# EAGLE board sx1509-breakout_mount_remap4 (EAGLE 9.1.3)
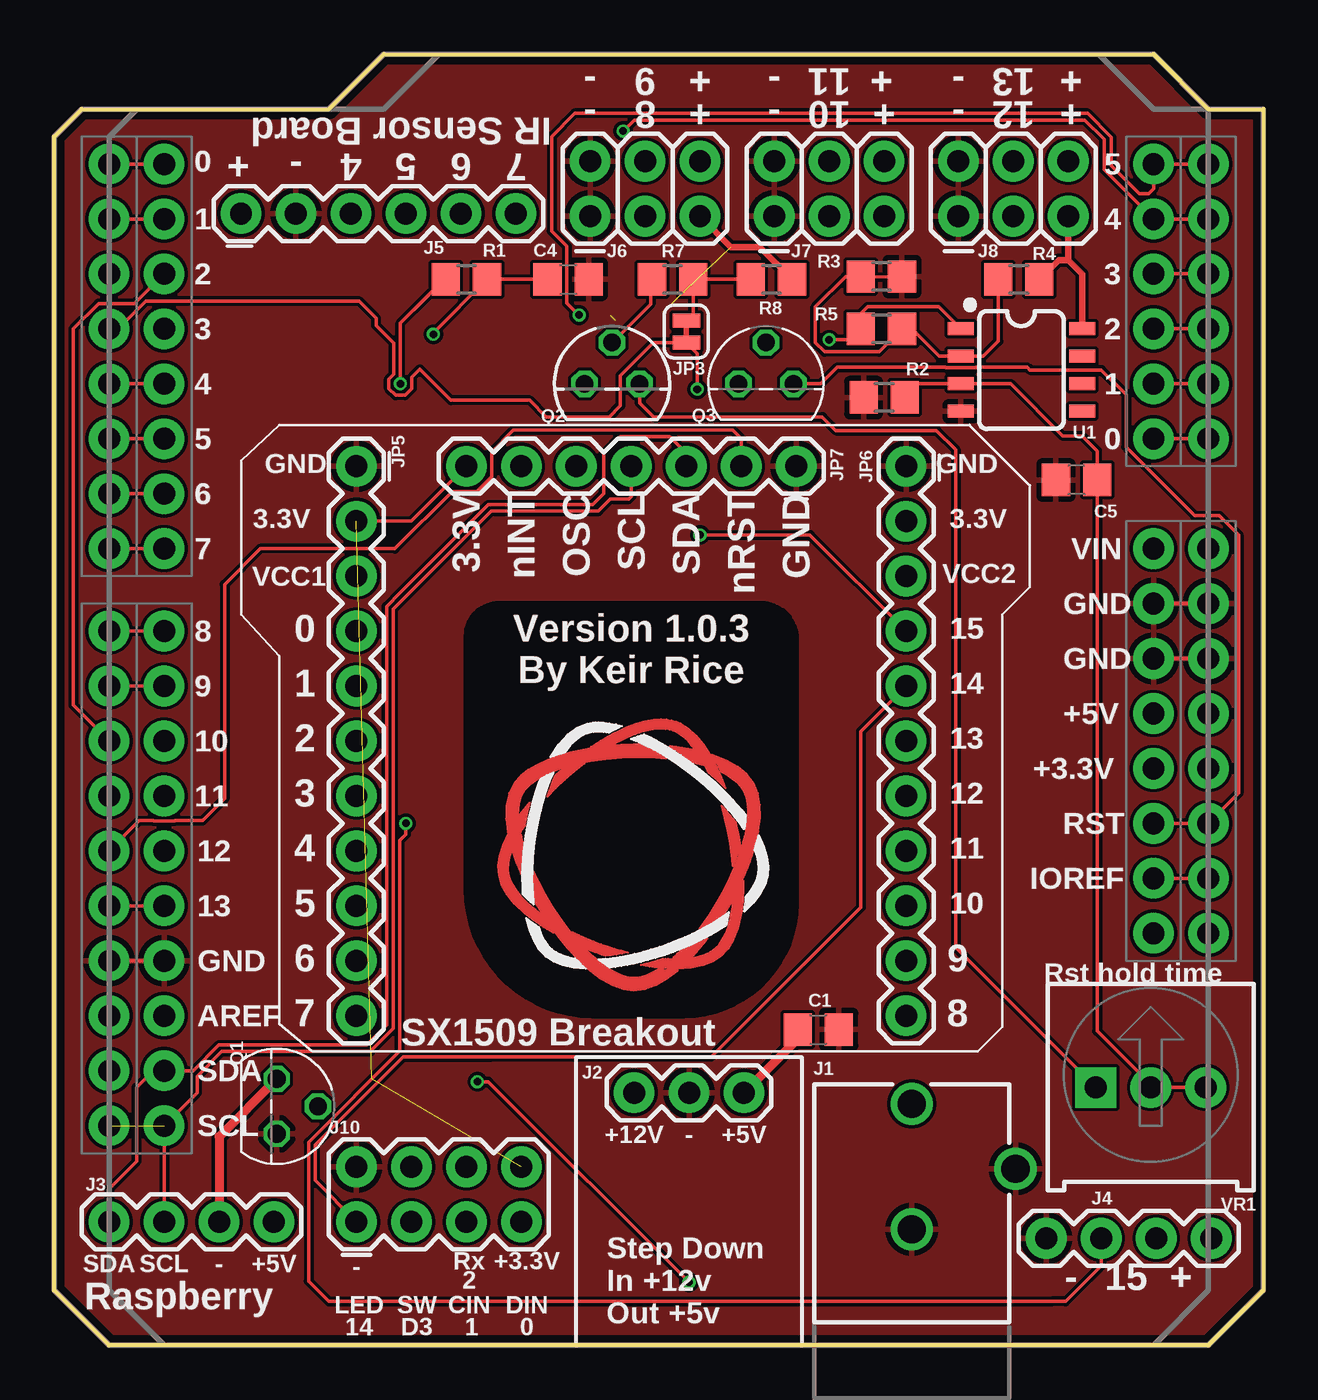
[diagram p0: board, top side]
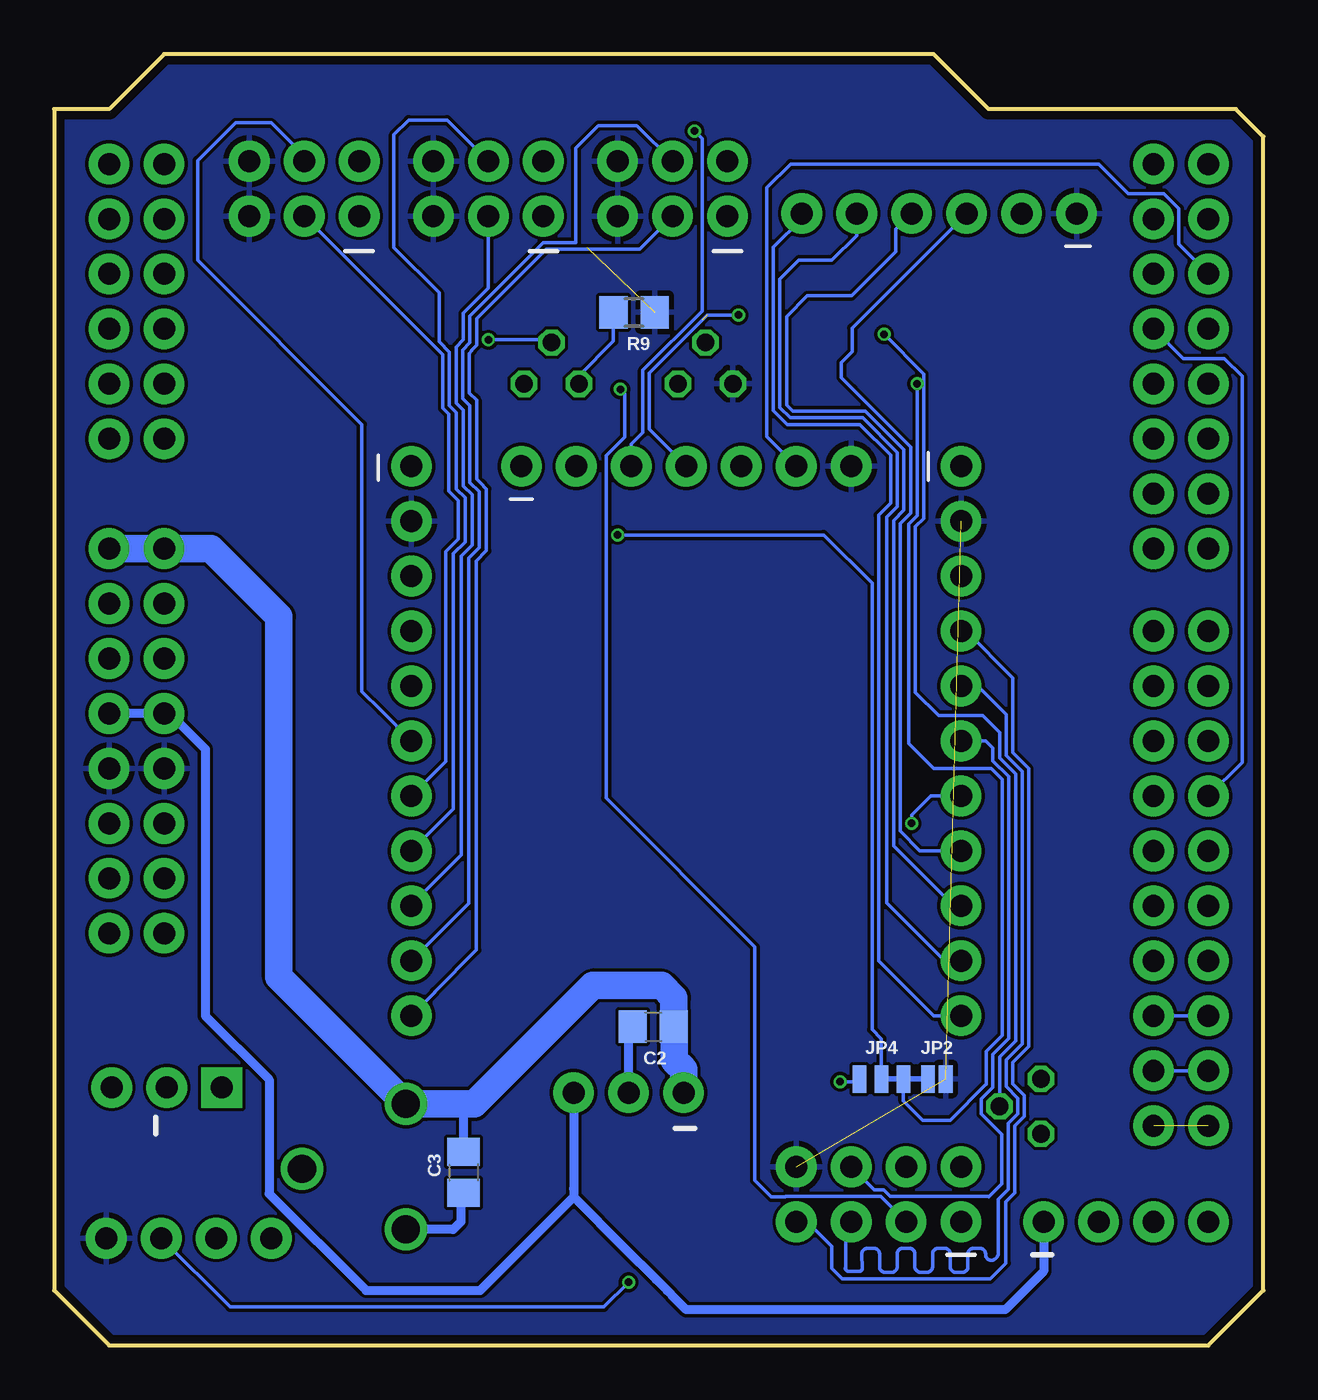
[diagram p1: board, bottom side, seen from below]

Size 55.88 x 59.69 mm. Coordinates in mm from the lower left corner, seen from the top.
Outline: 0,2.54 0,55.88 1.27,57.15 12.7,57.15 15.24,59.69 50.8,59.69 53.34,57.15 55.88,57.15 55.88,2.54 53.34,0 2.54,0 0,2.54
Copper layers (1*16): Top 0.035559375mm / dielectric 1.6mm / Bottom 0.035559375mm
Design rules "oshpark-2layer": minimum track width 6mil, minimum drill 10mil, track to track 6mil, track to pad 6mil, pad to pad 6mil, via to via 6mil, smd to smd 6mil, copper to edge 15mil, drill to drill 6mil, minimum pad ring 5mil, minimum via ring 5mil, stop-mask expansion 2.5mil, vias tented up to drill 0mil, thermal gap 10mil

## Footprints (pad centres in the part's own frame; a part is rotated, then mirrored left to right if it is on the bottom)
UNO_R3_SHIELD_NOLABELS = drill 1.016 pad 1.88: 3.3V 24.13,-3.81; 5V 24.13,-1.27; A0 24.13,11.43; A1 24.13,13.97; A2 24.13,16.51; A3 24.13,19.05; A4 24.13,21.59; A5 24.13,24.13; AREF -24.13,-15.24; D2 -24.13,19.05; D3 -24.13,16.51; D4 -24.13,13.97; D5 -24.13,11.43; D6 -24.13,8.89; D7 -24.13,6.35; D8 -24.13,2.54; D9 -24.13,0; D10 -24.13,-2.54; D11 -24.13,-5.08; D12 -24.13,-7.62; D13 -24.13,-10.16; GND@0 24.13,1.27; GND@1 24.13,3.81; GND@2 -24.13,-12.7; IOREF 24.13,-8.89; NC 24.13,-11.43; RES 24.13,-6.35; RX -24.13,24.13; SCL -24.13,-20.32; SDA -24.13,-17.78; TX -24.13,21.59; VIN 24.13,6.35
C0805 = smd 1.3 x 1.5: 1 -0.95,0; 2 0.95,0
POWER_JACK_PTH_BREAD = drill 1.3: GND 0,7.9; GNDBREAK 4.8,10.7; PWR 0,13.7
1X03 = drill 1.016 pad 1.88: 1 0,0; 2 2.54,0; 3 5.08,0
1X04 = drill 1.016 pad 1.88: 1 0,0; 2 2.54,0; 3 5.08,0; 4 7.62,0
1X06 = drill 1.016 pad 1.88: 1 0,0; 2 2.54,0; 3 5.08,0; 4 7.62,0; 5 10.16,0; 6 12.7,0
2X3 = drill 1.016 pad 1.88: 1 0,0; 2 0,2.54; 3 2.54,0; 4 2.54,2.54; 5 5.08,0; 6 5.08,2.54
2X4 = drill 1.016 pad 1.88: 1 -3.81,-1.27; 2 -3.81,1.27; 3 -1.27,-1.27; 4 -1.27,1.27; 5 1.27,-1.27; 6 1.27,1.27; 7 3.81,-1.27; 8 3.81,1.27
SMT-JUMPER_2_NO_NO-SILK = smd 0.635 x 1.27: 1 -0.406,0; 2 0.406,0
SMT-JUMPER_2_NC_TRACE_SILK = smd 0.635 x 1.27: 1 -0.508,0; 2 0.508,0
SMT-JUMPER_3_1-NC_TRACE_NO-SILK = smd 0.635 x 1.27: 1 -1.016,0; 2 0,0; 3 1.016,0
1X11 = drill 1.016 pad 1.88: 1 0,0; 2 2.54,0; 3 5.08,0; 4 7.62,0; 5 10.16,0; 6 12.7,0; 7 15.24,0; 8 17.78,0; 9 20.32,0; 10 22.86,0; 11 25.4,0
1X07 = drill 1.016 pad 1.88: 1 0,0; 2 2.54,0; 3 5.08,0; 4 7.62,0; 5 10.16,0; 6 12.7,0; 7 15.24,0
TO92 = drill 0.813 octagon: 1 1.27,0; 2 0,1.905; 3 -1.27,0
TO92D = drill 0.813 octagon: B 0,1.905; C 1.27,0; E -1.27,0
R0805 = smd 1.3 x 1.5: 1 -0.95,0; 2 0.95,0
SO08 = smd 0.6 x 1.2: 1 -1.905,-2.8; 2 -0.635,-2.8; 3 0.635,-2.8; 4 1.905,-2.8; 5 1.905,2.8; 6 0.635,2.8; 7 -0.635,2.8; 8 -1.905,2.8
TRIMPOT-PTH-3386U = drill 1.016 pad 1.88 square: 1 -2.54,-0.015 | drill 1.016 pad 1.88: 2 0,-0.015; 3 2.54,-0.015

## Placement (x,y rotation side)
B1  DownConnection  [UNO_R3_SHIELD_NOLABELS]  26.67,30.48 0 top
B2  UpConnection  [UNO_R3_SHIELD_NOLABELS]  29.21,30.48 0 top
C1  0.1uF  [C0805]  35.31,14.61 0 top
C2  0.1uF  [C0805]  28.19,14.73 0 bottom
C3  0.1uF  [C0805]  36.96,8 270 bottom
C4  0.1uF  [C0805]  23.75,49.28 0 top
C5  330uF  [C0805]  47.24,40.01 180 top
J1  Pi Power Jack  [POWER_JACK_PTH_BREAD]  39.62,-2.54 0 top
J2  12V to 5V  [1X03]  26.8,11.68 0 top
J3  Pi Connection  [1X04]  10.16,5.71 180 top
J4  [1X04]  53.47,4.95 180 top
J5  IR Sensors  [1X06]  8.64,52.32 0 top
J6  Switch A + B  [2X3]  24.77,52.2 0 top
J7  Switch C + D  [2X3]  33.27,52.2 0 top
J8  Switch E + F  [2X3]  41.78,52.2 0 top
J10  LED + Radio  [2X4]  17.78,6.99 0 top
JP2  JUMPER-SMT_2_NO_NO-SILK  [SMT-JUMPER_2_NO_NO-SILK]  15.09,12.32 0 bottom
JP3  Enable Hold to Reset  [SMT-JUMPER_2_NC_TRACE_SILK]  29.21,46.86 90 top
JP4  JUMPER-SMT_3_1-NC_TRACE_NO-SILK  [SMT-JUMPER_3_1-NC_TRACE_NO-SILK]  17.65,12.32 0 bottom
JP5  [1X11]  13.97,40.64 270 top
JP6  [1X11]  39.37,40.64 270 top
JP7  [1X07]  34.29,40.64 180 top
Q1  BC337  [TO92]  10.29,11.05 270 top
Q2  2N3906  [TO92D]  25.78,44.45 0 top
Q3  BC547  [TO92]  32.89,44.45 0 top
R1  100  [R0805]  19.05,49.28 0 top
R2  22.1k  [R0805]  38.35,43.81 0 top
R3  22k  [R0805]  38.23,49.4 180 top
R4  16.2k  [R0805]  44.58,49.28 0 top
R5  221k  [R0805]  38.23,46.99 0 top
R7  1k  [R0805]  28.57,49.28 0 top
R8  1k  [R0805]  33.15,49.28 180 top
R9  1k  [R0805]  29.08,47.75 180 bottom
U1  OP-AMP  [SO08]  44.7,45.09 270 top
U$2  [TRI_LOGO_TOP_15MM]  26.67,22.86 180 top
VR1  10k  [TRIMPOT-PTH-3386U]  50.67,11.94 0 top

## Library data of the parts
B1 B2 U$2 = keir_library
C1-C5 R1-R5 R7 R9 = resistor
J1 = SparkFun-Connectors; PROD_ID: PRT-10811
J2 J10 JP5-JP7 = SparkFun-Connectors
J3 J4 = SparkFun-Connectors; PROD_ID: CONN-09696
J5 = SparkFun-Connectors; PROD_ID: CONN-08437
J6-J8 = SparkFun-Connectors; PROD_ID: CONN-11566
JP2-JP4 = SparkFun-Jumpers
Q1 = transistor-npn
Q2 = transistor-small-signal
Q3 = transistor-npn; NOTE: Pull high until we get comparitor high output
R8 = resistor; NOTE: Pull the switch high
U1 = SparkFun-IC-Amplifiers; PROD_ID: NA-XXXXX
VR1 = SparkFun-Resistors; PROD_ID: RES-09730; SF_SKU: COM-09806

## Nets
3: J4.3 JP5.7
3.3V: B1.3.3V B2.3.3V J4.1 J5.1 J6.5 J6.6 J7.5 J7.6 J8.5 J8.6 J10.8 JP2.2 JP5.2 JP6.2 JP7.7 Q2.E R4.2 R8.1 R9.1 U1.8
4: J5.3 JP5.8
5: J5.4 JP5.9
5V: B1.5V B2.5V C1.1 J2.3 J3.1
6: J5.5 JP5.10
7: J5.6 JP5.11
8: J6.3 JP6.11
9: J6.4 JP6.10
10: J7.3 JP6.9
10_TO_2: B1.D10 B2.D2
11: J7.4 JP6.8
11_TO_3: B1.D11 B2.D3
12: J8.3 JP6.7
12V: B1.VIN B2.VIN C2.2 C3.1 J1.PWR J2.1
13: J8.4 JP6.6
14: J10.1 JP6.5
15: JP4.2 JP6.4
15_PLUG: J4.2 JP4.1
$N99: JP3.2 R7.2 R8.2
*D5: B1.D5 B2.D5
*D6: B1.D6 B2.D6
*D9: B1.D9 B2.D9
A0: B1.A0 B2.A0
A1: B1.A1 B2.A1
A2: B1.A2 B2.A2
A3: B1.A3 B2.A3
AREF: B1.AREF B2.AREF
COMP_OUT: Q3.2 R5.1 U1.1
D4: B1.D4 B2.D4
D7: B1.D7 B2.D7
D8: B1.D8 B2.D8
D13: B1.D13 B2.D13
GND: B1.GND@0 B1.GND@1 B1.GND@2 B2.GND@0 B2.GND@1 B2.GND@2 C1.2 C2.1 C3.2 C4.2 C5.2 J1.GND J1.GNDBREAK J2.2 J4.4 J5.2 J6.1 J6.2 J7.1 J7.2 J8.1 J8.2 J10.2 JP5.1 JP6.1 JP7.1 Q1.1 R2.1 R3.1 U1.4
IOREF: B1.IOREF B2.IOREF
N$1: Q2.B R7.1
N$2: C4.1 Q1.2 R1.2
N$3: Q3.3 R9.2
N$5: R3.2 R4.1 R5.2 U1.2
N$7: Q2.C VR1.1
N$8: C5.1 R2.2 U1.3 VR1.2 VR1.3
NINT: B1.D2 JP7.6
NRESET: B1.D12 JP7.2
OSCIO: JP7.5
PI_GROUND: J3.2 Q1.3
PIPOWER_SIGNAL: JP2.1 JP4.3 R1.1
RES: B1.RES B2.RES Q3.1
RX: B1.RX B2.RX
RXDATA: J10.6 JP5.6
SCIN: J10.5 JP5.5
SCL: B1.A5 B1.SCL B2.A5 B2.SCL J3.3 JP7.4
SDA: B1.A4 B1.SDA B2.A4 B2.SDA J3.4 JP7.3
SDIN: J10.7 JP5.4
TX: B1.TX B2.TX
VCC1: JP5.3
VCC2: JP6.3
WAKE_SW: B1.D3 J10.3 JP3.1

## Tracks (layer width: path | path; a pad name or v marks a point on that pad's centre or on a via)
3  (via drill 0.35)
  Top 0.152: v16.26,24.13 16.26,23.62 15.98,23.34 15.98,13.61 11.76,9.4 11.76,2.97 12.7,2.03 46.1,2.03 46.74,2.03 48.39,3.68 J4.3
  Bottom 0.152: JP5.7 15.37,25.4 16.26,24.51 v16.26,24.13
3.3V  (3 unrouted)
  Top 0.152: JP5.2 16.51,38.1 JP7.7 | 47.5,46.94 U1.8
  Top 0.305: 46.86,50.16 J8.5 | U1.8 47.5,49.52 46.86,50.16 | J6.5 31.27,50.77 32.61,50.77 R8.1 | R4.2 46.42,50.16 46.86,50.16
  pour Bottom: 0,55.88 1.27,57.15 12.7,57.15 15.24,59.69 50.8,59.69 53.34,57.15 55.88,57.15 55.88,2.54 53.34,0 2.54,0 0,2.54
4
  Bottom 0.152: JP5.8 15.88,22.86 16.79,23.77 16.79,38 16.31,38.48 16.31,41.53 18.97,44.2 19.51,44.74 19.51,45.43 19.01,45.93 19.01,47.03 J5.3
5
  Bottom 0.152: JP5.9 14.31,20.32 17.09,23.1 17.09,38.13 16.61,38.61 16.61,41.4 18.39,43.18 21.75,43.18 22.03,43.47 22.03,47.56 21.08,48.51 19.02,48.51 16.99,50.55 16.99,51.59 J5.4
5V
  Top 0.406: J2.3 34.36,14.16 C1.1
  Bottom 0.406: 31.94,11.75 J2.3 31.88,7.24 | B2.5V B1.5V 50.55,29.21 48.9,27.56 48.9,15.24 45.94,12.29 45.94,7.02 41.47,2.54 36.45,2.54 | 36.45,2.54 36.2,2.54 31.88,6.86 | 36.45,2.54 | 31.88,7.24 31.88,6.86 | 31.88,7.24 31.88,6.86 | 31.88,6.86 29.53,4.51 28.07,3.05 | 28.07,3.05 27.56,2.54 | J3.1 10.16,3.43 11.94,1.65 26.67,1.65 28.07,3.05
6
  Bottom 0.152: JP5.10 14.73,17.78 17.4,20.45 17.4,38.29 16.92,38.77 16.92,41.28 18.52,42.88 21.87,42.88 22.34,43.34 22.34,49.29 21.46,50.16 19.94,50.16 18.8,51.31 J5.5
7
  Bottom 0.152: JP5.11 15.24,15.24 17.78,17.78 17.78,38.37 17.22,38.93 17.22,41.15 18.64,42.57 22,42.57 22.64,43.22 22.64,50.76 21.34,52.07 J5.6
8
  Bottom 0.152: 36.19,39.88 36.36,40.05 36.36,43.43 36.36,43.69 36.7,44.03 36.7,45.85 36.57,45.97 36.57,46.02 36.36,46.23 36.36,47.46 33.15,50.67 28.83,50.67 J6.3 | 36.19,39.88 35.9,39.59 35.9,36.73 36.37,36.26 36.37,18.28 38.3,16.35 38.3,16.31 JP6.11 | 36.19,39.88
9
  Bottom 0.152: JP6.10 36.72,20.43 36.72,36.39 36.23,36.87 36.23,39.46 36.66,39.89 36.66,43.43 37,43.77 37,46.02 36.66,46.36 36.66,47.59 33.27,50.98 31.78,50.98 31.78,55.34 30.73,56.39 28.96,56.39 J6.4
10
  Bottom 0.152: JP6.9 39.37,20.37 37.07,22.67 37.07,36.5 36.56,37.01 36.56,39.32 36.97,39.73 36.97,43.23 37.31,43.57 37.31,46.14 36.97,46.48 36.97,47.71 35.81,48.87 35.81,49.53 J7.3
10_TO_2
  Top 0.152: B2.D2 3.71,48.16 2.06,48.16 0.89,46.99 0.89,29.59 B1.D10
11
  Bottom 0.152: JP6.8 37.43,24.8 37.43,36.61 36.89,37.14 36.89,39.18 37.3,39.59 37.3,43.13 37.61,43.44 37.61,45.92 38.09,46.39 38.09,48.66 40.18,50.75 40.18,55.96 39.5,56.64 37.72,56.64 J7.4
11_TO_3
  Bottom 0.152: B2.D3 3.71,45.62 1.8,45.62 0.99,44.81 0.99,26.95 B1.D11
12
  Bottom 0.152: JP6.7 37.78,26.99 37.78,36.7 37.21,37.27 37.21,39.05 37.66,39.5 37.66,43.05 37.92,43.32 37.92,45.79 42.04,49.91 J8.3
12V
  Bottom 0.406: C3.1 36.96,11.03 37.08,11.16
  Bottom 1.27: B2.VIN B1.VIN 48.64,36.83 45.49,33.68 45.49,17.04 39.62,11.18 J1.PWR | 38.77,11.16 J1.PWR | J1.PWR 37.08,11.16 36.47,11.16 30.99,16.64 27.81,16.64 27.24,16.07 C2.2 27.23,14.72 27.23,13.18 26.8,12.75 J2.1
13
  Bottom 0.152: J8.4 44.32,54.99 45.85,56.52 47.5,56.52 49.25,54.76 49.25,50.16 41.66,42.57 41.66,30.23 40.77,29.34 JP6.6
14
  Top 0.152: JP6.5 37.27,28.38 37.27,20.26 30.36,13.35 20.19,13.35 | 20.19,13.35 19.7,13.35 | J10.1 12.06,7.62 12.06,9.27 16.14,13.35 20.19,13.35
15  (via drill 0.35)
  Top 0.152: v29.84,37.47 34.92,37.47 JP6.4
  Bottom 0.152: v29.84,37.47 20.32,37.47 18.09,35.23 18.09,14.61 17.65,14.17 JP4.2 17.65,12.52
15_PLUG  (via drill 0.35)
  Top 0.152: v29.34,2.92 20.07,12.19 v19.56,12.19
  Bottom 0.152: J4.2 47.75,1.78 30.48,1.78 v29.34,2.92 | v19.56,12.19 18.8,12.19 JP4.1
$N99
  Top 0.152: JP3.2 29.52,47.69 R7.2 R8.2
*D5
  Top 0.152: B1.D5 B2.D5
*D6
  Top 0.152: B1.D6 B2.D6
*D9
  Top 0.152: B1.D9 B2.D9
A0
  Top 0.152: B2.A0 B1.A0
A1
  Top 0.152: B1.A1 B2.A1
A2
  Top 0.152: B2.A2 B1.A2
A3
  Top 0.152: B1.A3 52.07,49.53 B2.A3
AREF
  Bottom 0.152: B2.AREF B1.AREF
COMP_OUT  (via drill 0.35)
  Top 0.152: U1.1 40.89,48.01 37.59,48.01 37.28,47.69 R5.1 36.77,46.48 v35.81,46.48
  Bottom 0.152: v35.81,46.48 33.02,46.48 Q3.2
D4
  Top 0.152: B1.D4 B2.D4
D7
  Top 0.152: B1.D7 B2.D7
D8
  Top 0.152: B1.D8 B2.D8
D13
  Top 0.152: B1.D13 B2.D13
GND
  Top 0.152: B1.GND@2 B2.GND@2 | B1.GND@1 B2.GND@1 | B2.GND@0 B1.GND@0 | 41.53,43.18 U1.4
  Bottom 0.406: C3.2 37.08,6.92 37.08,5.71 37.44,5.36 39.6,5.36 | J2.2 29.34,14.54 C2.1
  Bottom 1.27: 39.6,5.36 J1.GND
  pour Top: 0,55.88 1.27,57.15 12.7,57.15 15.24,59.69 50.8,59.69 53.34,57.15 55.88,57.15 55.88,2.54 53.34,0 2.54,0 0,2.54
HOLE
  cutout Bottom: 16.38,12.95 15.62,12.95 15.62,11.68 16.38,11.68
IOREF
  Top 0.152: B1.IOREF B2.IOREF
LOGO
  cutout Top: 34.29,32.65 34.29,20.44 arc-90 29.09,15.24 24.89,15.24 arc-90 19.05,21.08 19.05,32.78 arc-90 20.56,34.29 32.65,34.29 arc-90
N$1
  Top 0.152: R7.1 27.56,49.21 27.56,48.13 Q2.B
N$2  (via drill 0.35)
  Top 0.152: 19.56,49.28 R1.2 17.53,46.8 v17.53,46.74 | 19.56,49.28 C4.1 | 19.94,48.9 19.56,49.28
  Bottom 0.152: v17.53,46.74 15.7,44.91 15.7,38.23 16.08,37.85 16.08,30.18 15.01,29.11 12.98,29.11 12.19,28.32 12.19,27.15 11.46,26.41 11.46,14.07 12.19,13.34 Q1.2
N$3
  Bottom 0.152: Q3.3 31.62,44.83 30.03,46.42 R9.2
N$5
  Top 0.152: R5.2 39.28,46.86 39.46,46.86 | 39.21,49.37 R3.2 36.58,49.4 35.18,48.01 35.18,46.35 35.6,45.94 38.12,45.94 R5.2 | R4.1 43.63,46.42 42.93,45.72 U1.2 40.89,45.72 39.62,46.99 R5.2
N$7
  Top 0.152: 47.36,12.7 VR1.1 41.66,18.4 41.66,41.4 40.77,42.29 36.12,42.29 35.5,42.91 27.7,42.91 27.05,43.56 Q2.C
N$8
  Top 0.152: 47.77,40.01 C5.1 | VR1.3 50.8,11.92 | 50.8,11.92 VR1.2 | C5.1 48.19,14.53 50.8,11.92 | R2.2 39.94,44.45 U1.3 44.2,44.45 46.61,42.04 47.5,42.04 48.19,41.34 C5.1
NINT
  Bottom 0.152: B1.D2 3.91,50.9 3.91,52.55 4.6,53.24 6.25,53.24 7.62,54.61 21.84,54.61 22.95,53.51 22.95,42 JP7.6
NRESET
  Top 0.152: B1.D12 3.94,24.26 4.57,24.26 4.6,24.23 5.56,24.23 5.59,24.26 6.86,24.26 7.87,25.27 7.87,35.18 9.53,36.83 15.75,36.83 18.39,39.47 19.53,39.47 20.22,40.16 20.22,41.3 21.22,42.3 31.36,42.3 31.75,41.91 JP7.2
PI_GROUND
  Top 0.406: Q1.3 7.62,9.65 J3.2
PIPOWER_SIGNAL  (via drill 0.35)
  Top 0.152: 18.07,49.15 R1.1 18.03,49.28 | 16.64,47.88 18.03,49.28 | v16,44.45 16,47.24 18.03,49.28
  Bottom 0.152: v16,44.45 16,38.35 16.38,37.97 16.38,27.81 15.24,26.67 12.57,26.67 12.06,26.16 12.06,14.33 12.8,13.59 12.8,12.06 12.83,12.06 14.48,10.41 15.75,10.41 16.64,11.3 JP4.3
  Bottom 0.254: JP4.3 JP2.1
RES
  Top 0.152: B1.RES B2.RES 54.74,25.53 54.74,37.47 53.85,38.35 52.7,38.35 50.55,40.51 50.32,40.74 49.63,41.43 49.53,41.53 49.53,43.94 48.39,45.09 45.09,45.09 44.96,45.21 42.62,45.21 42.6,45.19 41.21,45.19 41.19,45.21 36.2,45.21 35.43,44.45 Q3.1
RX
  Top 0.152: B1.RX B2.RX
RXDATA
  Bottom 0.152: JP5.6 12.83,27.94 12.5,27.61 12.5,27.02 11.76,26.29 11.76,14.2 12.5,13.46 12.5,11.93 13.03,11.4 13.03,10.7 12.1,9.77 12.1,7.46 12.7,6.86 12.72,6.88 17.25,6.88 17.55,7.19 17.98,7.19 J10.6
SCIN
  Bottom 0.152: JP5.5 13.21,30.48 11.89,29.16 11.89,27.28 11.15,26.54 11.15,13.95 11.89,13.21 11.89,11.97 11.35,11.43 11.35,10.71 11.79,10.27 11.79,7.22 12.26,6.75 12.26,4.25 arc90 12.57,3.94 arc90 12.84,4.2 12.84,4.23 arc-90 13.11,4.5 13.39,4.5 arc-90 13.66,4.23 13.66,3.65 arc90 13.92,3.38 14.21,3.38 arc90 14.47,3.65 14.47,4.23 arc-90 14.74,4.5 15.02,4.5 arc-90 15.29,4.23 15.29,3.65 arc90 15.56,3.38 15.84,3.38 arc90 16.11,3.65 16.11,4.23 arc-90 16.37,4.5 16.66,4.5 arc-90 16.92,4.23 16.92,3.65 arc90 17.19,3.38 17.47,3.38 arc90 17.74,3.65 17.74,4.23 arc-90 18.01,4.5 18.29,4.5 arc-90 18.56,4.23 | 18.56,4.2 18.56,4.23 | J10.5 19.3,5.46 19.3,3.62 arc-115 19.18,3.43 arc2 18.67,3.43 arc-92 18.54,3.56 18.56,4.23
SCL  (via drill 0.35)  (2 unrouted)
  Top 0.152: B2.A5 B1.A5 50.8,53.47 50.57,53.24 50.14,53.24 48.86,54.52 48.86,55.84 47.75,56.95 24.05,56.95 22.99,55.88 22.99,51.51 23.69,50.8 23.69,48.18 24.25,47.62 v24.26,47.62 | J3.3 B2.SCL 6.6,11.68 6.6,12.45 7.74,13.58 14.61,13.58 15.67,14.65 15.67,34.04 20.19,38.56 25.15,38.56 25.7,39.12 26.54,39.12 26.67,39.24 JP7.4
  Bottom 0.152: v24.26,47.62 25.7,47.62 28.38,44.95 28.38,42.34 JP7.4 | 25.93,47.39 26.62,46.7
SDA  (via drill 0.35)
  Top 0.152: J3.4 2.54,7.24 3.81,8.51 3.81,11.94 4.57,12.7 B2.SDA 6.43,12.7 7.62,13.89 14.44,13.89 15.37,14.82 15.37,34.16 16,34.8 | 29.21,40.39 JP7.3 29.21,41.24 28.45,42 26.16,42 25.44,41.27 25.4,41.27 25.4,39.37 24.89,38.86 20.07,38.86 16,34.8 | 16,34.8 | B2.A4 B1.A4 48.51,54.36 48.51,55.75 47.62,56.64 26.8,56.64 v26.29,56.13
  Bottom 0.152: B2.SDA B1.SDA | v26.29,56.13 25.93,55.78 25.93,47.82 28.68,45.07 28.68,42.19 29.21,41.66 JP7.3
SDIN
  Bottom 0.152: JP5.4 13.74,33.02 11.58,30.86 11.58,27.4 10.85,26.67 10.85,13.82 11.58,13.08 11.58,12.1 11.55,12.06 11.04,11.56 11.04,10.58 11.49,10.14 11.49,7.09 11.49,7.08 11.49,7.05 11.9,6.64 11.9,3.81 12.63,3.08 19.46,3.08 19.94,3.56 19.94,4.57 21.08,5.71 J10.7
TX
  Top 0.152: B1.TX B2.TX
WAKE_SW  (via drill 0.35)
  Top 0.152: B1.D3 2.97,46.99 4.24,48.26 14.1,48.26 14.88,47.47 14.88,47.14 15.7,46.33 15.7,44.9 15.47,44.67 15.47,44.23 15.78,43.92 16.22,43.92 16.53,44.23 16.53,44.75 16.91,45.12 18.34,43.69 21.97,43.69 22.75,42.91 25.64,42.91 26.16,43.43 26.16,44.83 27.69,46.35 JP3.1 29.72,45.85 v29.72,44.2
  Bottom 0.152: J10.3 17.68,6.88 22.07,6.88 22.1,6.86 22.73,6.86 23.5,7.62 23.5,18.41 30.38,25.3 30.38,41.12 29.52,41.99 29.52,43.99 v29.72,44.2

## Text on the board
tNames: - | 9 | + | - | 11 | + | - | 13 | + | IR Sensor Board | - | 8 | + | - | 10 | + | - | 12 | + | 0 | + | - | 4 | 5 | 6 | 7 | 5 | 1 | 4 | 2 | 3 | 3 | 2 | 4 | 1 | 5 | GND | GND | 0 | 6 | 3.3V | nINT | OSC | SCL | SDA | nRST | GND | 3.3V | 3.3V | 7 | VCC1 | VCC2 | VIN | Version 1.0.3 / By Keir Rice | GND | 8 | 0 | 15 | 1 | 14 | GND | 9 | +5V | 2 | 13 | 10 | 3 | 12 | +3.3V | 11 | RST | 4 | 11 | 12 | IOREF | 13 | 5 | 10 | 6 | 9 | GND | Rst hold time | AREF | 7 | 8 | SX1509 Breakout | SDA | SCL | +12V | - | +5V | SDA | SCL | - | +5V | - | Rx | +3.3V | - | 15 | + | 2 | Raspberry | LED | SW | CIN | DIN | 14 | D3 | 1 | 0 | Step Down / In +12v / Out +5v
bNames: Enable JP3 for / hard reset by switch. | Pi power control. / / Connect 1-3 & 2-4 / for soft switch via pin 15. / / Connect 3-5 & 4-6 / for always on. / Pin 15 routed to J4 connector.